# Altium PCB Pcb.PcbDoc
Units mm, origin at the board's own origin, x right, y up, seen from the top; angles counter-clockwise.
Board outline 76.52 x 28.6 mm, 2 copper layers (Top Layer, Bottom Layer), stack 1.071 mm thick; 63 components, 42 nets, 219 pads, 56 vias.
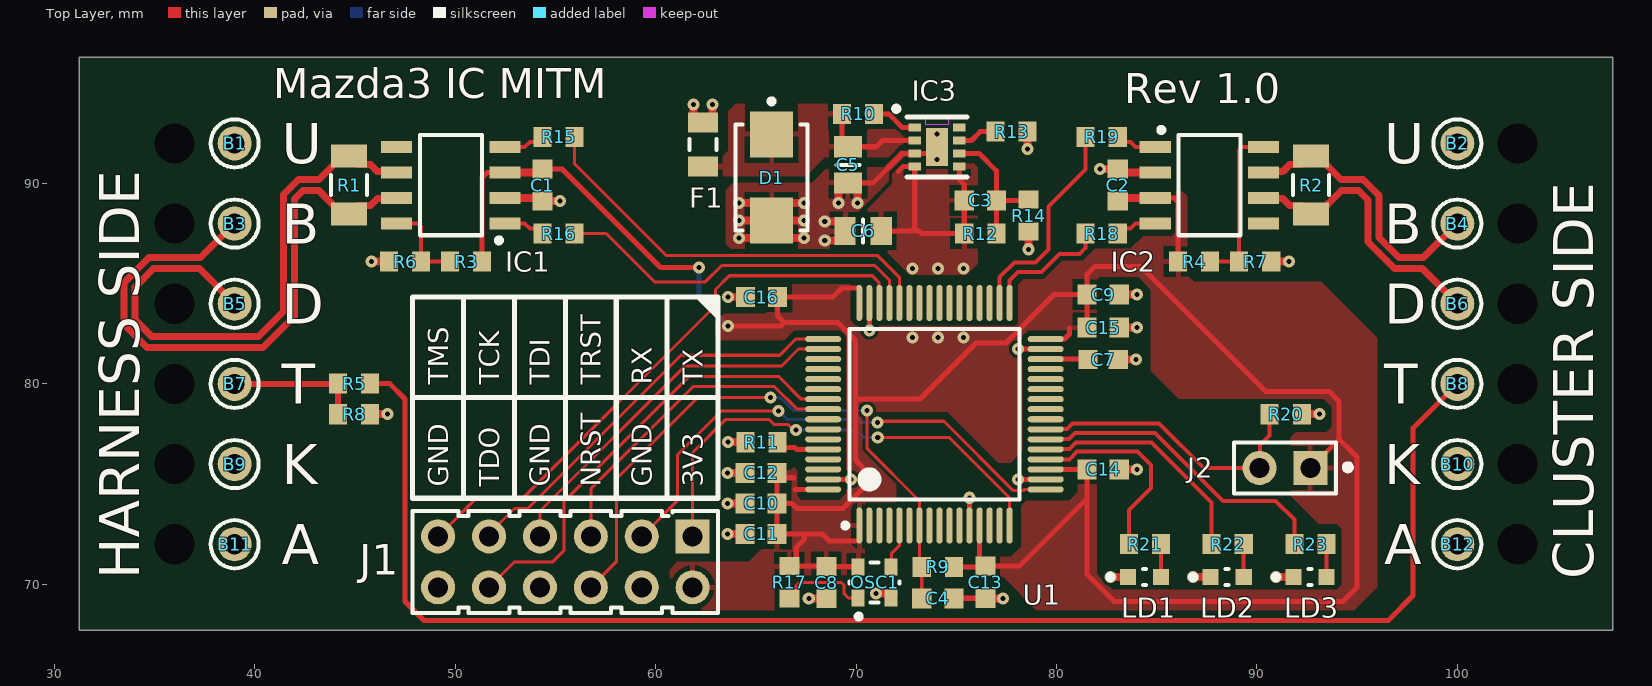
[diagram p0: Top Layer view]
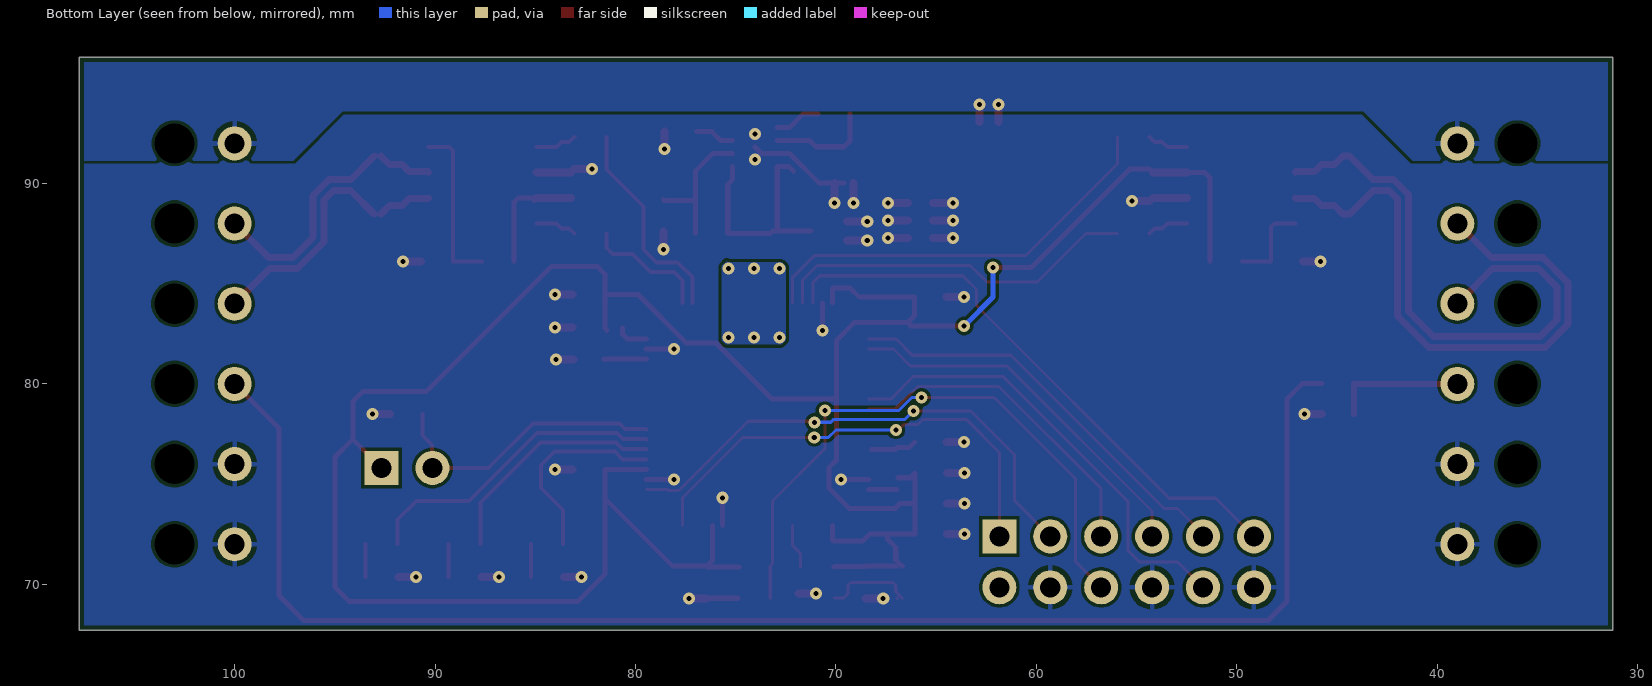
[diagram p1: Bottom Layer view, seen from below]
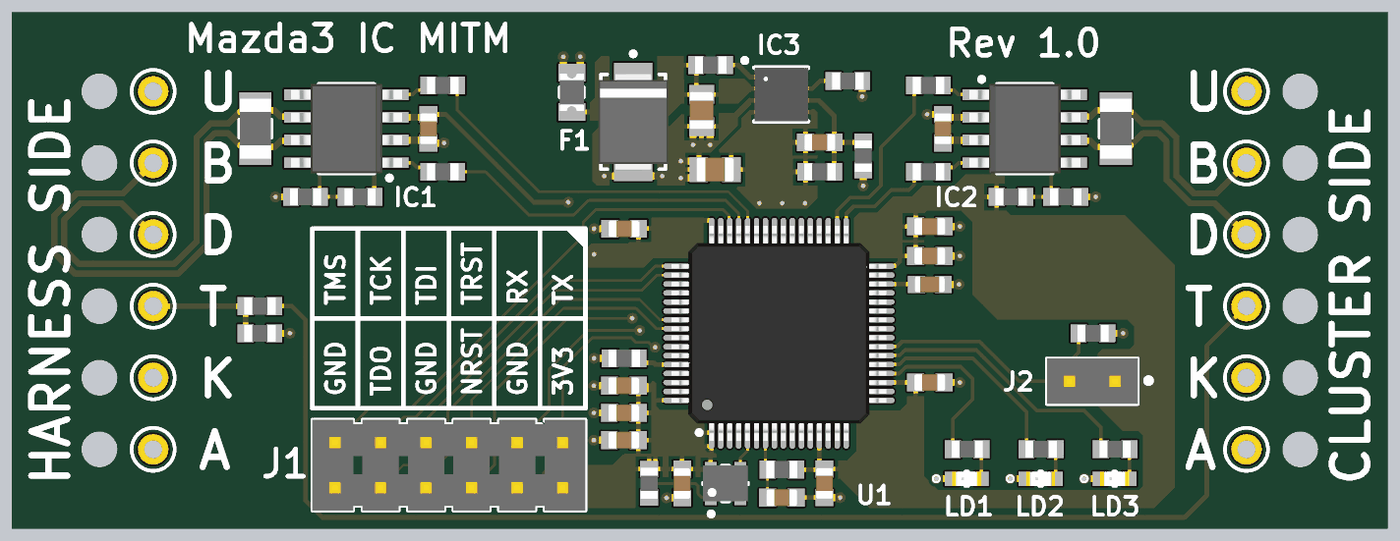
[diagram p2: 3D render of the assembled board from above, using the file's embedded part models]

## Layer stack, top to bottom
Top Solder: solder mask 0.0102, Solder Resist, Dk 3.5
Top Layer: signal copper 0.0356
Dielectric 1: dielectric 1, FR-4, Dk 4.8
Bottom Layer: signal copper 0.0356
Bottom Solder: solder mask 0.0102, Solder Resist, Dk 3.5

## Board outline
31.242,67.7 31.242,96.3 107.758,96.3 107.758,67.7

## Design rules (kind name [scope] priority, off if disabled: settings)
BoardOutlineClearance [All] p1: gap=0.254 ignorepadtopadclearanceinfootprint=FALSE except(0: Arc-SplitContinuation Track-SplitContinuation SMDPad-SplitContinuation THPad-SplitContinuation Via-SplitContinuation Fill-SplitContinuation Poly-SplitContinuation Region-SplitContinuation Text-SplitContinuation)
Clearance Clearance_CAN [InNetClass('CAN') vs InNetClass('CAN')] p1: gap=0.2 ignorepadtopadclearanceinfootprint=FALSE
Clearance [All] p2: gap=0.152 ignorepadtopadclearanceinfootprint=FALSE except(0: Arc-Hole Track-Hole SMDPad-Hole THPad-Hole Via-Hole Fill-Hole Poly-Hole Region-Hole Text-Hole)
MinimumSolderMaskSliver [All] p1: minsoldermaskwidth=0.15
PolygonConnect [All] p1: thpad.connectstyle=Relief thpad.reliefconductorwidth=0.254 thpad.reliefentries=4 thpad.polygonreliefangle="90 Angle" thpad.airgapwidth=0.254 smdpad.connectstyle=Relief smdpad.reliefconductorwidth=0.254 smdpad.reliefentries=4 smdpad.polygonreliefangle="90 Angle" smdpad.airgapwidth=0.254 via.connectstyle=Direct via.reliefconductorwidth=0.254 via.reliefentries=4 via.polygonreliefangle="90 Angle" via.airgapwidth=0.254
RoomDefinition Top [InComponentClass('Top')] p1 off: confinementstyle=ConfineIn formatcopy=TRUE lockcomponents=FALSE outline 178.943,26.924 532.892,26.924 532.892,50.292 178.943,50.292
RoutingVias [All] p1: holewidth=0.711 width=0.6 viastyle="Through Hole" minholewidth=0.2 minwidth=0.45 maxholewidth=0.25 maxwidth=1.27
SolderMaskExpansion [All] p1: expansion=0.102 istentingtop=FALSE
Width [All] p1: maxlimit=2 minlimit=0.152 preferedwidth=0.254
29 further rules are at their usual default settings.

## Classes and differential pairs
net class CAN: CAR_HS_CAN_H CAR_HS_CAN_L IC_HS_CAN_H IC_HS_CAN_L

## Components (designator, comment, footprint, x,y, rotation, side; value= is the part's Value field where it differs from the comment)
B1 "Plated Hole" c170h100 39,92 r0 top
B2 "Plated Hole" c170h100 100,92 r0 top
B3 "Plated Hole" c170h100 39,88 r0 top
B4 "Plated Hole" c170h100 100,88 r0 top
B5 "Plated Hole" c170h100 39,84 r0 top
B6 "Plated Hole" c170h100 100,84 r0 top
B7 "Plated Hole" c170h100 39,80 r0 top
B8 "Plated Hole" c170h100 100,80 r0 top
B9 "Plated Hole" c170h100 39,76 r0 top
B10 "Plated Hole" c170h100 100,76 r90 top
B11 "Plated Hole" c170h100 39,72 r90 top
B12 "Plated Hole" c170h100 100,72 r90 top
C1 "100nF" CAPC1608X87N 54.356,89.916 r90 top
C2 "100nF" CAPC1608X87N 83.058,89.916 r270 top
C3 "22pF" CAPC1608X87N 76.2,89.154 r180 top
C4 "100nF" CAPC1608X87N 74.079,69.304 r180 top
C5 "22uF" CAPC2012X135N 69.596,90.932 r90 top
C6 "22uF" CAPC2012X135N 70.358,87.63 r0 top
C7 "2.2uF" CAPC1608X90N 82.334,81.217 r180 top
C8 "100nF" CAPC1608X87N 68.517,70.091 r90 top
C9 "4.7uF" CAPC1608X87N 82.334,84.455 r180 top
C10 "1uF" CAPC1608X87N 65.261,74.037 r0 top
C11 "100nF" CAPC1608X87N 65.261,72.513 r0 top
C12 "100nF" CAPC1608X87N 65.261,75.561 r0 top
C13 "100nF" CAPC1608X87N 76.454,70.104 r90 top
C14 "100nF" CAPC1608X87N 82.334,75.736 r180 top
C15 "100nF" CAPC1608X87N 82.334,82.804 r180 top
C16 "100nF" CAPC1608X87N 65.278,84.328 r0 top
D1 "SMBJ17A" DIOM5336X265N 65.786,90.297 r270 top
F1 "200mA-24V" FUSR_LITTELFUSE_0805L010 62.357,91.948 r270 top
IC1 "SN65HVD230DR" SOIC127P600X175-8N 49.784,89.916 r180 top
IC2 "SN65HVD230DR" SOIC127P600X175-8N 87.63,89.916 r0 top
IC3 "MPM3612GLQ-P" LGA10 74.041,91.821 r0 top
J1 "Header 12" SAMTEC_TSW-106-23-L-D 55.499,71.12 r180 top
J2 "Header 2" SAMTEC_TSW-101-23-L-D 91.401,75.805 r90 top
LD1 "Green" LED_KINGBRIGHT_KPH-1608CGCK 84.392,70.358 r0 top
LD2 "Green" LED_KINGBRIGHT_KPH-1608CGCK 88.519,70.358 r0 top
LD3 "Green" LED_KINGBRIGHT_KPH-1608CGCK 92.646,70.358 r0 top
OSC1 "8MHz" OSC_MICROCHIP_CDFN2520-4LD-PL-1 70.93,70.091 r90 top
R1 "120" RESC3216X65N 44.704,89.916 r90 top
R2 "120" RESC3216X65N 92.71,89.916 r270 top
R3 "Undefined" RESC1608X55N 50.546,86.106 r0 top
R4 "Undefined" RESC1608X55N 86.868,86.106 r180 top
R5 "Undefined" RESC1608X55N 44.958,80.01 r0 top
R6 "0" RESC1608X55N 47.498,86.106 r0 top
R7 "0" RESC1608X55N 89.916,86.106 r180 top
R8 "0" RESC1608X55N 44.958,78.486 r180 top
R9 "10k" RESC1608X55N 74.079,70.866 r0 top
R10 "0" RESC1608X55N 70.104,93.472 r180 top
R11 "10k" RESC1608X55N 65.278,77.089 r180 top
R12 "1M" RESC1608X55N 76.2,87.503 r180 top
R13 "1M" RESC1608X55N 77.762,92.583 r180 top
R14 "220k" RESC1608X55N 78.613,88.392 r90 top
R15 "0" RESC1608X55N 55.156,92.329 r0 top
R16 "0" RESC1608X55N 55.156,87.503 r0 top
R17 "0" RESC1608X55N 66.675,70.104 r90 top
R18 "0" RESC1608X55N 82.258,87.503 r180 top
R19 "0" RESC1608X55N 82.258,92.329 r180 top
R20 "10k" RESC1608X55N 91.44,78.486 r180 top
R21 "10k" RESC1608X55N 84.417,72.009 r180 top
R22 "10k" RESC1608X55N 88.544,72.009 r180 top
R23 "10k" RESC1608X55N 92.671,72.009 r180 top
U1 "STM32F446RE" STM-LQFP64_N 73.914,78.486 r90 top

## Footprints (in the part's own frame and the unit in brackets; to place one, negate y for a bottom-side part, rotate by r counter-clockwise, add the part's x,y. Pads: shape width x height; smd on the part's side, far side on the other; paste and mask are expansions set on the pad)
c170h100 [mm] "Plated Through Hole: Hole Dia.=1mm Pad Dia.=1.7mm, IPC-7251 Level A"
  round 1.7 hole 1: 1(0,0)
  silkscreen extent -1.2,-1.2 1.2,1.2
CAPC1608X87N [mm] "Chip Capacitor, Body 1.6x0.8mm IPC Medium Density"
  rect 0.95x1 smd: 1(-0.8,0) 2(0.8,0)
  body extent -0.87,-0.47 0.88,0.48, height 0.87
CAPC1608X90N [mm] "Chip Capacitor, Body 1.6x0.8mm IPC Medium Density"
  rect 0.95x0.95 smd: 1(-0.75,0) 2(0.75,0)
  body extent -0.85,-0.45 0.85,0.45, height 0.9
CAPC2012X135N [mm] "Chip Capacitor, Body 2.0x1.25mm, IPC Medium Density"
  rect 1.05x1.4 smd: 1(-0.9,0) 2(0.9,0)
  silkscreen extent 0,-0.58 0,0.58, body extent -1.05,-0.67 1.05,0.68, height 1.25
DIOM5336X265N [mm] "DO-214-AA/SMB Diode, Molded Body; 5.34mm L X 3.625mm W X 2.65mm H, IPC Medium Density"
  rect 2.3x2.15 smd: 1(-2.15,0) 2(2.15,0)
  silkscreen extent -3.92,-1.8 2.65,1.8, body extent -2.7,-1.95 2.7,1.95, height 2.4
FUSR_LITTELFUSE_0805L010 [mm] "Surface Mount POLY-FUSE® Resettable PTC, 0805L Series"
  rect 1x1.5 smd: 1(-1.1,0) 2(1.1,0)
  silkscreen extent -0.28,-0.67 0.28,0.67, body extent -1.05,-0.67 1.05,0.68, height 1
LED_KINGBRIGHT_KPH-1608CGCK [mm] "SMT Green LED, Case 0603, Body L 1.6 x W 0.8mm H 0.65mm"
  rect 0.8x0.8 smd: 1(-0.825,0) 2(0.825,0)
  silkscreen extent -1.82,-0.4 0.08,0.4, body extent -0.8,-0.4 0.8,0.4, height 0.65
LGA10 [mm] "LGA (3mmx3mmx2mm)"
  rect 0.625x0.4 smd: 1(-1.112,0.975) 2(-1.112,0.325) 3(-1.112,-0.325) 4(-1.112,-0.975) 5(1.112,-0.975) 6(1.112,-0.325) 7(1.112,0.325) 8(1.112,0.975)
  rect 1.1x1.9 smd: EP(0,0)
  Top Layer keep-out region: -0.575,1.125 0.575,1.125 0.575,1.525 -0.575,1.525
  silkscreen extent -2.16,-1.5 1.5,2.03, body extent -1.5,-1.5 1.5,1.5, height 2.01
OSC_MICROCHIP_CDFN2520-4LD-PL-1 [mm] "MICROCHIP Case CDFN2520-4LD-PL-1, SMD Oscillator, QFN, 4 pins, 2.5mm x 2.0mm"
  rect 0.85x0.65 smd: 1(-0.775,0.825) 2(-0.775,-0.825) 3(0.775,-0.825) 4(0.775,0.825)
  silkscreen extent -1.82,-1.25 1,1.25, body extent -1,-1.25 1,1.25, height 0.9
RESC1608X55N [mm] "Chip Resistor, EIA 0603, Metric 1608, Body 1.6x0.8mm, IPC Medium Density"
  rect 0.9x1 smd: 1(-0.8,0) 2(0.8,0)
  body extent -0.87,-0.47 0.88,0.48, height 0.55
RESC3216X65N [mm] "Chip Resistor, EIA 1206, Metric 3216, Body 3.2x1.6mm, IPC Medium Density"
  rect 1.15x1.8 smd: 1(-1.45,0) 2(1.45,0)
  silkscreen extent -0.5,-0.9 0.5,0.9, body extent -1.67,-0.87 1.68,0.88, height 0.65
SAMTEC_TSW-101-23-L-D [mm] "2 Contacts - Pitch 2.54mm - Dual Row  Through Mount Straigh Header (Post Lead 5.84mm, Tail Lead 2.92mm, Insulator 2.54mm)"
  rect 1.7x1.7 hole 1: 1(0,-1.27)
  round 1.7 hole 1: 2(0,1.27)
  silkscreen extent -1.27,-3.28 1.27,2.54, body extent -1.27,-2.54 1.27,2.54, height 8.38
SAMTEC_TSW-106-23-L-D [mm] "12 Contacts - Pitch 2.54mm - Dual Row  Through Mount Straigh Header (Post Lead 5.84mm, Tail Lead 2.92mm, Insulator 2.54mm)"
  rect 1.7x1.7 hole 1: 1(-6.35,-1.27)
  round 1.7 hole 1: 2(-6.35,1.27) 3(-3.81,-1.27) 4(-3.81,1.27) 5(-1.27,-1.27) 6(-1.27,1.27) 7(1.27,-1.27) 8(1.27,1.27) 9(3.81,-1.27) 10(3.81,1.27) 11(6.35,-1.27) 12(6.35,1.27)
  silkscreen extent -7.62,-2.54 7.62,2.54, body extent -7.62,-2.54 7.62,2.54, height 8.38
SOIC127P600X175-8N [mm] "SOIC 8, Pitch 1.27mm - Body 4x5mm, IPC Medium Density"
  rect 1.55x0.6 smd: 1(-2.7,1.905) 2(-2.7,0.635) 3(-2.7,-0.635) 4(-2.7,-1.905) 5(2.7,-1.905) 6(2.7,-0.635) 7(2.7,0.635) 8(2.7,1.905)
  silkscreen extent -2.53,-2.5 1.55,2.88, body extent -3.1,-2.5 3.1,2.5, height 1.75
STM-LQFP64_N [mm] "Thin QFP, 64-Leads, Body 10x10mm, Pitch 0.5mm, IPC Medium Density"
  oval 1.8x0.3 smd: 1(-5.55,3.75) 2(-5.55,3.25) 3(-5.55,2.75) 4(-5.55,2.25) 5(-5.55,1.75) 6(-5.55,1.25) 7(-5.55,0.75) 8(-5.55,0.25) 9(-5.55,-0.25) 10(-5.55,-0.75) 11(-5.55,-1.25) 12(-5.55,-1.75) 13(-5.55,-2.25) 14(-5.55,-2.75) 15(-5.55,-3.25) 16(-5.55,-3.75) 33(5.55,-3.75) 34(5.55,-3.25) 35(5.55,-2.75) 36(5.55,-2.25) 37(5.55,-1.75) 38(5.55,-1.25) 39(5.55,-0.75) 40(5.55,-0.25) 41(5.55,0.25) 42(5.55,0.75) 43(5.55,1.25) 44(5.55,1.75) 45(5.55,2.25) 46(5.55,2.75) 47(5.55,3.25) 48(5.55,3.75)
  oval 0.3x1.8 smd: 17(-3.75,-5.55) 18(-3.25,-5.55) 19(-2.75,-5.55) 20(-2.25,-5.55) 21(-1.75,-5.55) 22(-1.25,-5.55) 23(-0.75,-5.55) 24(-0.25,-5.55) 25(0.25,-5.55) 26(0.75,-5.55) 27(1.25,-5.55) 28(1.75,-5.55) 29(2.25,-5.55) 30(2.75,-5.55) 31(3.25,-5.55) 32(3.75,-5.55) 49(3.75,5.55) 50(3.25,5.55) 51(2.75,5.55) 52(2.25,5.55) 53(1.75,5.55) 54(1.25,5.55) 55(0.75,5.55) 56(0.25,5.55) 57(-0.25,5.55) 58(-0.75,5.55) 59(-1.25,5.55) 60(-1.75,5.55) 61(-2.25,5.55) 62(-2.75,5.55) 63(-3.25,5.55) 64(-3.75,5.55)
  silkscreen extent -5.67,-4.25 4.25,4.57, body extent -6,-6 6,6, height 1.5

## Part data
B1 B2 B3 B4 B5 B6 B7 B8 B9 B10 B11 B12: library part PLATED_HOLE1.0_PAD1.7, "Single Terminal Socket", Author="CERN DEM JLC", Component Type="Standard (No BOM)", ComponentHeight=0mm, CreateDate=11/05/2017, Family="Plated Hole", HelpURL=Undefined, LatestRevisionDate=11/05/2017, Mounted=No, PackageDescription="Plated Through Hole: Hole Dia.=1.0mm Pad Dia.=1.7mm,  IPC-7251 Level A", Part Description="Plated Through Hole: Hole Dia.=1.0mm Pad Dia.=1.7mm,  IPC-7251 Level A", Part Number=PLATED_HOLE1.0_PAD1.7, Pin Count=1, Sense=No, SMD=No, Socket=No, Status=None
C1 C2 C4 C8 C11 C12 C13 C14 C15 C16: library part CC0603_100NF_50V_10%_X5R, "Non-polarised capacitor", Case=0603, Manufacturer=GENERIC, Manufacturer1=TDK, Manufacturer1 ComponentHeight=0.9mm, Manufacturer1 Part Number=C1608X5R1H104K080AA, Tolerance=±10%, Voltage=50V, Author="CERN DEM MR", Component Type=Standard, CreateDate=08/01/2016, HelpURL=\\cern.ch\dfs\Applications\Altium\Datasheets\CC0603_X5R_TDK_C.pdf, LatestRevisionDate=08/01/2016, Manufacturer Part Number=CC0603_100NF_50V_10%_X5R, Mounted=Yes, Part Description="SMD Multilayer Chip Ceramic Capacitor", Part Number=CC0603_100NF_50V_10%_X5R, Pin Count=2, Sense=No, SMD=Yes, Socket=No, Status=None, TC=X5R
C3: library part CC0603_22PF_50V_5%_NP0, "Non-polarised capacitor", Case=0603, Manufacturer=GENERIC, Manufacturer1=PHYCOMP, Manufacturer1 ComponentHeight=0.87mm, Manufacturer1 Part Number=223886715229, Tolerance=±5%, Voltage=50V, Author="CERN DEM JLC", Component Type=Standard, CreateDate=03/12/2007, HelpURL=\\cern.ch\dfs\Applications\Altium\Datasheets\CC0603_NP0_PHYCOMP.pdf, LatestRevisionDate=03/12/2007, Manufacturer Part Number=CC0603_22PF_50V_5%_NP0, Mounted=Yes, Part Description="SMD Multilayer Chip Ceramic Capacitor", Part Number=CC0603_22PF_50V_5%_NP0, Pin Count=2, Sense=No, SMD=Yes, Socket=No, Status=Preferred, TC=C0G/NP0
C5 C6: library part CC0805_22UF_16V_10%_X5R, "Non-polarised capacitor", Case=0805, Manufacturer=GENERIC, Manufacturer1=Samsung, Manufacturer1 ComponentHeight=1.35mm, Manufacturer1 Part Number=CL21X226MAYNNWE, Manufacturer Part Number=CC0805_22UF_25V_20%_X6S, Tolerance=±20%, Voltage=25V, Author="CERN DEM JLC", Component Type=Standard, CreateDate=25/10/2012, HelpURL=\\cern.ch\dfs\Applications\Altium\Datasheets\CC0805_X5R_TDK_C.pdf, LatestRevisionDate=25/10/2012, Mounted=Yes, Part Description="SMD Multilayer Chip Ceramic Capacitor", Part Number=CC0805_22UF_25V_20%_X6S, Pin Count=2, Sense=No, SMD=Yes, Socket=No, Status=Preferred, TC=X6S
C7: library part CC0603_2.2UF_10V_20%_X7R, "Non-polarised capacitor", Case=0603, Manufacturer=GENERIC, Manufacturer1="TAIYO YUDEN", Manufacturer1 ComponentHeight=0.9mm, Manufacturer1 Part Number=LMK107B7225MA-T, Tolerance=±20%, Voltage=10V, Author="CERN DEM JLC", Component Type=Standard, CreateDate=22/06/2011, HelpURL=\\cern.ch\dfs\Applications\Altium\Datasheets\CC0603_X7R_TAIYO-YUDEN_HIGH-VALUE.pdf, LatestRevisionDate=27/06/2011, Manufacturer Part Number=CC0603_2.2UF_10V_20%_X7R, Mounted=Yes, Part Description="SMD Multilayer Chip Ceramic Capacitor", Part Number=CC0603_2.2UF_10V_20%_X7R, Pin Count=2, Sense=No, SMD=Yes, Socket=No, Status="Not Recommended", TC=X7R
C9: library part CC0603_4.7UF_6.3V_10%_X5R, "Non-polarised capacitor", Case=0603, Manufacturer=GENERIC, Manufacturer1=PHYCOMP, Manufacturer1 ComponentHeight=0.87mm, Manufacturer1 Part Number=225520613672, Manufacturer Part Number=CC0603_4.7uF_6.3V_10%_X5R, Tolerance=±10%, Voltage=6.3V, Author="CERN DEM JLC", Component Type=Standard, CreateDate=03/12/2007, HelpURL=\\cern.ch\dfs\Applications\Altium\Datasheets\CC0805_X5R_PHYCOMP_HC.pdf, LatestRevisionDate=03/12/2007, Mounted=Yes, Part Description="SMD Multilayer Chip Ceramic Capacitor", Part Number=CC0603_4.7UF_6.3V_10%_X5R, Pin Count=2, Sense=No, SMD=Yes, Socket=No, Status=Preferred, TC=X5R
C10: library part CC0603_1UF_16V_10%_X7R, "Non-polarised capacitor", Case=0603, Manufacturer=GENERIC, Manufacturer1="YAGEO PHYCOMP", Manufacturer1 ComponentHeight=0.9mm, Manufacturer1 Part Number=223878615663, Manufacturer Part Number=CC0603_1uF_16V_10%_X7R, Tolerance=±10%, Voltage=16V, Author="CERN DEM JLC", Component Type=Standard, CreateDate=03/12/2007, HelpURL=\\cern.ch\dfs\Applications\Altium\Datasheets\CC0603_X7R_PHYCOMP.pdf, LatestRevisionDate=17/04/2015, Mounted=Yes, Part Description="SMD Multilayer Chip Ceramic Capacitor", Part Number=CC0603_1UF_16V_10%_X7R, Pin Count=2, Sense=No, SMD=Yes, Socket=No, Status=None, TC=X7R
D1: library part SMBJ15A, "Zener Diode", Case=DO-214AA, Manufacturer1="FAIRCHILD SEMICONDUCTOR", Power=600W, Voltage=17V, Author="CERN DEM JLC", Bonding=No, Component Type=Standard, ComponentHeight=2.65mm, CreateDate=08.12.2008, Device=SMBJ17A, HelpURL=\\cern.ch\dfs\Applications\Altium\Datasheets\SMBJ.pdf, LatestRevisionDate=19.12.2011, Manufacturer1 Part Number=SMBJ17A, Mounted=Yes, PackageDescription="DO-214-AA/SMB Diode, Molded Body; 5.34mm L X 3.625mm W X 2.65mm H, IPC Medium Density", Part Description="Uni-Directional Transient Voltage Suppressor Diode", Part Number=SMBJ17A, Pin Count=2, PressFit=No, Sense=No, SMD=Yes, Socket=No
F1: library part FUSR_LITTELFUSE_0805L010YR, "Fuse", Manufacturer1=LITTELFUSE, Manufacturer1 Part Number=0805L020/24YR, Author="CERN DEM JLC", Component Type=Standard, ComponentHeight=1mm, CreateDate=11/09/2012, Family="Fuses Resettable", HelpURL=\\cern.ch\dfs\Applications\Altium\Datasheets\FUSR_LITTELFUSE_0805L010YR.pdf, LatestRevisionDate=11/09/2012, Mounted=Yes, PackageDescription="Surface Mount POLY-FUSE® Resettable PTC, 0805L Series", Part Description="POLYFUSE® Surface Mount Resettable PTC", Part Number=0805L020/24YR, Pin Count=2, PressFit=No, Sense=No, SMD=Yes, Socket=No
IC1 IC2: "3.3V CAN Bus Transceiver", Case=SOIC8, Manufacturer1="TEXAS INSTRUMENTS", Author="CERN DEM JMW", Bonding=No, Component Type=Standard, ComponentHeight=1.75mm, CreateDate=22/10/2015, Device=SN65HVD230DR, HelpURL=\\cern.ch\dfs\Applications\Altium\Datasheets\SN65HVD233DG4.pdf, LatestRevisionDate=22/10/2015, Manufacturer1 Part Number=SN65HVD230DR, Mounted=Yes, PackageDescription="SOIC 8, Pitch 1.27mm, Body 4x5mm, IPC Medium Density", Part Description="3.3V CAN Bus Transceiver", Part Number=SN65HVD230DR, Pin Count=8, PressFit=No, Sense=No, SMD=Yes, Socket=No
IC3: Manufacturer1=MPS, Manufacturer1 Part Number=MPM3612GLQ-P, Part Number=MPM3612GLQ-P
J1: library part SAMTEC_TSW-106-23-L-D, "Connector 12 Male", Manufacturer1=SAMTEC, Manufacturer1 Part Number=TSW-106-23-L-D, Author="CERN DEM MR", Component Type=Standard, ComponentHeight=8.38mm, CreateDate=08/03/2017, Family="Header 12", HelpURL=\\cern.ch\dfs\Applications\Altium\Datasheets\SAMTEC_TSW-106-23-L-D.pdf, LatestRevisionDate=08/03/2017, Mounted=Yes, Part Description="12 Contacts, Pitch 2.54mm, Dual Row Through Mount Straight Header (Post Lead 5.84mm, Tail Lead 2.92mm, Insulator 2.54mm)", Part Number=SAMTEC_TSW-106-23-L-D, Pin Count=12, PressFit=No, Sense=No, SMD=No, Socket=No, Status=None
J2: library part SAMTEC_TSW-101-23-L-D, "Connector 2 Male", Manufacturer1=SAMTEC, Manufacturer1 Part Number=TSW-101-23-L-D, Author="CERN DEM MR", Component Type=Standard, ComponentHeight=8.38mm, CreateDate=08/03/2017, Family="Header 2", HelpURL=\\cern.ch\dfs\Applications\Altium\Datasheets\SAMTEC_TSW-101-23-L-D.pdf, LatestRevisionDate=08/03/2017, Mounted=Yes, Part Description="2 Contacts, Pitch 2.54mm, Dual Row Through Mount Straight Header (Post Lead 5.84mm, Tail Lead 2.92mm, Insulator 2.54mm)", Part Number=SAMTEC_TSW-101-23-L-D, Pin Count=2, PressFit=No, Sense=No, SMD=No, Socket=No, Status=None
LD1 LD2 LD3: library part LED_KINGBRIGHT_KPH-1608CGCK, "LED Green 1C 2A", Manufacturer1=KINGBRIGHT, Manufacturer1 Part Number=KPH-1608CGCK, Author="CERN DEM JLC", Bonding=No, Color=Green, Component Type=Standard, ComponentHeight=0.65mm, CreateDate=03/07/2017, HelpURL=\\cern.ch\dfs\Applications\Altium\Datasheets\LED_KINGBRIGHT_KPH-1608CGCK.pdf, LatestRevisionDate=03/07/2017, Mounted=Yes, PackageDescription="SMT Green LED, Case 0603, Body L 1.6 x W 0.8mm H 0.65mm", Part Description="SMD Green LED, Case 1.6mmX0.8mm(0603), 0.65mm Thickness", Part Number=LED_KINGBRIGHT_KPH-1608CGCK, Pin Count=2, PressFit=No, Sense=No, SMD=Yes, Socket=No
OSC1: library part OSC_25MHZ_MICROCHIP_DSC1003DL5-025.0000, "Oscillator 4 pins 1=S\T\ 2=GND 3=OUT 4=VDD", Manufacturer1="MICROCHIP TECHNOLOGY", Manufacturer1 Part Number=DSC1003DL2-008.0000, Part Number=OSC_8MHZ_MICROCHIP_DSC1003DL2-008.0000, Author="CERN DEM JLC", Bonding=No, Component Type=Standard, ComponentHeight=0.9mm, CreateDate=16/08/2018, HelpURL=\\cern.ch\dfs\Applications\Altium\Datasheets\OSC_MICROCHIP_DSC1003.pdf, LatestRevisionDate=16/08/2018, Mounted=Yes, PackageDescription="MICROCHIP Case CDFN2520-4LD-PL-1, SMD Oscillator, DFN, 4 pins, 2.5mm x 2.0mm", Part Description="1.8V-3.3V, ±10ppm, 25pF, -40..105°C, Surface Mount Low-Power Precision CMOS Oscillator (DSC1001 Series)", Pin Count=4, PressFit=No, Sense=No, SMD=Yes, Socket=No
R1 R2: library part R1206_120R_1%_0.25W_100PPM, "Resistor - 1%", Case=1206, Manufacturer=GENERIC, Manufacturer1="NIC COMPONENT", Manufacturer1 ComponentHeight=0.65mm, Manufacturer1 Part Number=NRC12F1200TRF, Power=0.25W, Tolerance=±1%, Author="CERN DEM JLC", Component Type=Standard, CreateDate=03/12/2007, HelpURL=\\cern.ch\dfs\Applications\Altium\Datasheets\R1206_NIC_NRC.pdf, LatestRevisionDate=13/03/2008, Manufacturer Part Number=R1206_120R_1%_0.25W_100PPM, Mounted=Yes, Part Description="General Purpose Thick Film Chip Resistor", Part Number=R1206_120R_1%_0.25W_100PPM, Pin Count=2, PressFit=No, Sense=No, SMD=Yes, Socket=No, Status=Preferred, TC=±100ppm/°C
R3 R4 R5: library part R0603_NO-VALUE, "Resistor", Case=0603, Author="CERN DEM JLC", Component Type=Standard, CreateDate=03.12.2007, HelpURL=Undefined, LatestRevisionDate=13.03.2008, Manufacturer=Undefined, Manufacturer1 ComponentHeight=Undefined, Manufacturer1 Example=Undefined, Manufacturer1 Part Number=Undefined, Manufacturer Part Number=R0603_NO-VALUE, Mounted=No, Part Description="Reserved Footprint For a 0603 (1608) Chip Resistor", Part Number=R0603_NO-VALUE, Pin Count=2, PressFit=No, Sense=No, SMD=Yes, Socket=No, Status=None
R6 R7 R8 R10 R15 R16 R17 R18 R19: library part R0603_0R_JUMPER, "Resistor", Case=0603, Manufacturer=GENERIC, Manufacturer1="NIC COMPONENT", Manufacturer1 ComponentHeight=0.55mm, Manufacturer1 Part Number=NRC06Z0, Author="CERN DEM JLC", Component Type=Standard, CreateDate=03.12.2007, HelpURL=\\cern.ch\dfs\Applications\Altium\Datasheets\R0603_NIC_NRC.pdf, LatestRevisionDate=13.03.2008, Manufacturer Part Number=R0603_0R_JUMPER, Mounted=Yes, Part Description="1A (0.05R Max DC Resistance) Zero Ohm Jumper", Part Number=R0603_0R_JUMPER, Pin Count=2, PressFit=No, Sense=No, SMD=Yes, Socket=No, Status=Preferred
R9 R11 R20 R21 R22 R23: library part R0603_10K_1%_0.1W_100PPM, "Resistor - 1%", Case=0603, Manufacturer=GENERIC, Manufacturer1="NIC COMPONENT", Manufacturer1 ComponentHeight=0.55mm, Manufacturer1 Part Number=NRC06F1002TRF, Power=0.1W, Tolerance=±1%, Author="CERN DEM JLC", Component Type=Standard, CreateDate=03/12/2007, HelpURL=\\cern.ch\dfs\Applications\Altium\Datasheets\R0603_NIC_NRC.pdf, LatestRevisionDate=13/03/2008, Manufacturer Part Number=R0603_10K_1%_0.1W_100PPM, Mounted=Yes, Part Description="General Purpose Thick Film Chip Resistor", Part Number=R0603_10K_1%_0.1W_100PPM, Pin Count=2, PressFit=No, Sense=No, SMD=Yes, Socket=No, Status=Preferred, TC=±100ppm/°C
R12 R13: library part R0603_1M_1%_0.1W_100PPM, "Resistor - 1%", Case=0603, Manufacturer=GENERIC, Manufacturer1="NIC COMPONENT", Manufacturer1 ComponentHeight=0.55mm, Manufacturer1 Part Number=NRC06F1004TRF, Power=0.1W, Tolerance=±1%, Author="CERN DEM JLC", Component Type=Standard, CreateDate=03/12/2007, HelpURL=\\cern.ch\dfs\Applications\Altium\Datasheets\R0603_NIC_NRC.pdf, LatestRevisionDate=13/03/2008, Manufacturer Part Number=R0603_1M_1%_0.1W_100PPM, Mounted=Yes, Part Description="General Purpose Thick Film Chip Resistor", Part Number=R0603_1M_1%_0.1W_100PPM, Pin Count=2, PressFit=No, Sense=No, SMD=Yes, Socket=No, Status=Preferred, TC=±100ppm/°C
R14: library part R0603_220K_1%_0.1W_100PPM, "Resistor - 1%", Case=0603, Manufacturer=GENERIC, Manufacturer1="NIC COMPONENT", Manufacturer1 ComponentHeight=0.55mm, Manufacturer1 Part Number=NRC06F2203TRF, Power=0.1W, Tolerance=±1%, Author="CERN DEM JLC", Component Type=Standard, CreateDate=03/12/2007, HelpURL=\\cern.ch\dfs\Applications\Altium\Datasheets\R0603_NIC_NRC.pdf, LatestRevisionDate=13/03/2008, Manufacturer Part Number=R0603_220K_1%_0.1W_100PPM, Mounted=Yes, Part Description="General Purpose Thick Film Chip Resistor", Part Number=R0603_220K_1%_0.1W_100PPM, Pin Count=2, PressFit=No, Sense=No, SMD=Yes, Socket=No, Status=Preferred, TC=±100ppm/°C
U1: "Arm® Cortex®-M4 core with DSP and FPU, 512 Kbytes Flash, 180 MHz CPU, ART Accelerator, Dual QSPI", Manufacturer1=STMicroelectronics, Manufacturer1 Part Number=STM32F446RET7, Manufacturer 1 Component Height=1.6mm, Supplier Part Number 1=511-STM32F446RET6, Author=PC, Create Date=29/03/2020, DesignItemId=STM32F446RE, HelpURL=https://www.st.com/resource/en/datasheet/stm32f446re.pdf, LatestRevisionDate=29/03/2020, Mounted=Yes, Part Description="Arm® Cortex®-M4 core with DSP and FPU, 512 Kbytes Flash, 180 MHz CPU, ART Accelerator, Dual QSPI", Part Number=STM32F446RE, Pin Count=64, PressFit=No, Sense=No, SMD=Yes, Socket=No, Supplier 1=Mouser, Supplier 2=Digi-Key

## Free pads (board coordinates)
  round 0 hole 2 unplated: 2(36,72) 2(36,76) 2(36,80) 2(36,84) 2(36,88) 2(36,92) 2(103,72) 2(103,76) 2(103,80) 2(103,84) 2(103,88) 2(103,92)

## Via types
v1: diameter 0.6, hole 0.25, Top Layer to Bottom Layer, tented both sides, 54 vias
v2: diameter 0.6, hole 0.25, Top Layer to Bottom Layer, 2 vias

## Nets (pads, with @x,y where several pads share a name; then routed paths per layer and width w, separated by ;. In a path a pad name is that pad's centre, name@x,y a point inside that pad or via, vN(x,y) a via of type N, cw(c..) or ccw(c..) an arc to the next point about the centre after c; other vN are vias at no path point)
CAN1_RX: R15.2 U1.44 | length 21.2
  Top Layer w0.152: R15.2 55.956,90.983 60.542,86.397 71.083,86.397 72.164,85.316 U1.44
CAN1_TX: R16.2 U1.45 | length 18.5
  Top Layer w0.152: R16.2 57.531,87.503 59.944,85.09 62.484,85.09 63.304,85.91 70.935,85.91 71.664,85.181 U1.45
CAN2_RX: R18.2 U1.33 | length 6.3
  Top Layer w0.2: U1.33 77.664,85.157 78.087,85.58 79.253,85.58 80.16,86.487 81.153,86.487 81.458,86.792 R18.2
CAN2_TX: R19.2 U1.34 | length 10.7
  Top Layer w0.2: U1.34 77.164,85.333 77.898,86.067 78.955,86.067 79.603,86.715 79.603,88.853 81.458,90.708 R19.2
CAR_HS_CAN_D: IC1.1 R16.1 | length 2.1
  Top Layer w0.2: IC1.1 53.467,88.011 53.723,87.755 54.104,87.755 R16.1
CAR_HS_CAN_H: B3.1 IC1.7 R1.1 | length 30.4
  Top Layer w0.35: B3.1 37.301,86.301 34.723,86.301 33.488,85.066 33.488,82.967 34.632,81.823 40.415,81.823 41.976,83.383 41.976,89.22 42.407,89.651 43.194,89.651 44.379,88.466 R1.1 45.133,88.895 45.775,88.895 46.126,89.246 47.049,89.246 IC1.7
CAR_HS_CAN_L: B5.1 IC1.6 R1.2 | length 28.6
  Top Layer w0.35: B5.1 37.249,85.751 34.951,85.751 34.038,84.838 34.038,83.194 34.86,82.372 40.187,82.372 41.426,83.611 41.426,89.448 42.179,90.201 43.214,90.201 44.379,91.366 R1.2 45.133,90.937 45.775,90.937 46.126,90.586 47.049,90.586 IC1.6
CAR_HS_CAN_R: IC1.4 R15.1 | length 2.1
  Top Layer w0.2: IC1.4 53.467,91.821 53.723,92.077 54.104,92.077 R15.1
CAR_PIN_T: B7.1 R5.1 R8.2 | length 6.7
  Top Layer w0.3: B7.1 44.148,80 R5.1 R8.2
GND: B9.1 B10.1 B11.1 B12.1 C1.1 C2.1 C4.1 C5.1 C6.1 C7.1 C8.1 C9.1 C10.1 C11.1 C12.1 C13.1 C14.1 C15.1 C16.1 D1.2 IC1.2 IC2.2 IC3.3 IC3.EP J1.4 J1.8 J1.12 LD1.1 LD2.1 LD3.1 OSC1.2 R6.1 R7.1 R8.1 R11.2 R13.1 R14.1 R20.1 U1.12 U1.18 U1.31 U1.47 U1.63 | length 46.2
  Top Layer w0.254: C1.1@54.191,89.281 C1.1 ; U1.63 v1(69.747,75.236) ; C5.1 70.855,90.032 72.319,91.496 IC3.3 73.716,91.496 IC3.EP ; v1(70.664,82.653) U1.47 ; C4.1 C13.1 ; U1.12 v1(75.664,74.319) ; v1(78.081,75.236) U1.18 ; v1(78.081,81.736) U1.31
  Top Layer w0.4: R8.1 v1(46.633,78.486) ; v1(45.823,86.106) R6.1 ; IC1.2 C1.1@54.191,89.281 ; C1.1 v1(55.231,89.116) ; v1(63.586,72.513) C11.1 ; v1(63.586,74.037) C10.1 ; v1(63.586,75.561) C12.1 ; v1(63.603,77.089) R11.2 ; v1(63.603,84.328) C16.1 ; v1@64.292,87.268 D1.2@65.167,87.268 ; v1@64.292,88.147 D1.2@65.167,88.147 ; v1@64.292,89.026 D1.2@65.167,89.026 ; D1.2@66.405,87.268 v1@67.28,87.268 ; D1.2@66.405,88.147 v1@67.28,88.147 ; D1.2@66.405,89.026 v1@67.28,89.026 ; v1(67.642,69.291) C8.1 ; v1@68.567,87.157 C6.1@69.442,87.157 ; v1@68.567,88.103 C6.1@69.442,88.103 ; v1@69.123,89.141 C5.1@69.123,90.016 ; v1@70.069,89.141 C5.1@70.069,90.016 ; v1(71.004,69.54) OSC1.2@71.879,69.54 ; C13.1 v1(77.329,69.304) ; v1(78.562,91.708) R13.1 ; v1(78.613,86.717) R14.1 ; v1(82.183,90.716) C2.1 ; v1(82.692,70.358) LD1.1 ; C7.1 v1(83.959,81.217) ; C14.1 v1(84.009,75.736) ; C15.1 v1(84.009,82.804) ; C9.1 v1(84.009,84.455) ; C2.1@83.223,90.551 IC2.2 ; v1(86.819,70.358) LD2.1 ; R7.1 v1(91.591,86.106) ; v1(90.946,70.358) LD3.1 ; R20.1 v1(93.115,78.486)
  other v1: 68.44,87.157 64.165,87.268 67.407,87.268 68.44,88.103 64.165,88.147 67.407,88.147 69.123,89.014 70.069,89.014 64.165,89.026 67.407,89.026
  other v2: 74.041,91.186 74.041,92.456
IC_HS_CAN_D: IC2.1 R19.1 | length 2.1
  Top Layer w0.2: R19.1 83.31,92.077 83.691,92.077 83.947,91.821 IC2.1
IC_HS_CAN_H: B4.1 IC2.7 R2.1 | length 13.7
  Top Layer w0.35: IC2.7 90.365,90.586 91.288,90.586 91.639,90.937 92.281,90.937 R2.1 ; R2.1@93.035,91.366 94.2,90.201 95.296,90.201 96.089,89.408 96.089,87.299 97.087,86.301 98.301,86.301 B4.1
IC_HS_CAN_L: B6.1 IC2.6 R2.2 | length 13.7
  Top Layer w0.35: IC2.6 90.365,89.246 91.288,89.246 91.639,88.895 92.281,88.895 R2.2 ; R2.2@93.035,88.466 94.22,89.651 95.069,89.651 95.539,89.18 95.539,87.071 96.859,85.751 98.249,85.751 B6.1
IC_HS_CAN_R: IC2.4 R18.1 | length 2.1
  Top Layer w0.2: R18.1 83.31,87.755 83.691,87.755 83.947,88.011 IC2.4
IC_PIN_T: B8.1 R5.2 | length 74.8
  Top Layer w0.254: R5.2 46.736,80.01 47.497,79.249 47.497,69.143 48.442,68.199 96.552,68.199 97.79,69.437 97.79,77.79 B8.1
LED1: R21.2 U1.20 | length 10.1
  Top Layer w0.2: U1.20 80.643,76.236 81.027,76.62 84.035,76.62 84.709,75.946 84.709,74.803 83.617,73.711 R21.2
LED2: R22.2 U1.21 | length 11.7
  Top Layer w0.2: U1.21 79.483,76.755 80.651,76.755 80.977,77.081 84.734,77.081 87.744,74.072 R22.2
LED3: R23.2 U1.22 | length 15.5
  Top Layer w0.2: U1.22 79.483,77.255 80.636,77.255 80.929,77.548 84.928,77.548 88.308,74.168 90.932,74.168 91.871,73.229 R23.2
LED_EN: J2.2 R20.2 U1.23 | length 14.6
  Top Layer w0.2: U1.23 79.483,77.755 80.523,77.755 80.796,78.028 85.126,78.028 87.349,75.805 J2.2 90.163,75.837 90.163,76.955 90.64,77.432 R20.2
MCU_CLK: OSC1.3 U1.5 | length 2.2
  Top Layer w0.152: OSC1.3 71.763,70.874 71.763,71.523 72.164,71.925 U1.5
NetC3_1: C3.1 IC3.6 R12.1 R14.2 | length 7
  Top Layer w0.254: IC3.6 76.144,91.496 77,90.64 C3.1 ; R12.1 C3.1 ; R14.2 78.575,89.154 C3.1
NetC5_2: C5.2 D1.1 F1.2 IC3.2 R10.2 | length 5.2
  Top Layer w0.254: R10.2 69.304,92.124 C5.2 71.004,91.832 71.318,92.146 IC3.2
NetC7_2: C7.2 U1.30 | length 2.1
  Top Layer w0.254: U1.30 81.565,81.236 C7.2
NetIC1_8: IC1.8 R3.1 R6.2 | length 4.5
  Top Layer w0.2: IC1.8 48.133,88.011 48.298,87.846 R6.2 R3.1
NetIC2_8: IC2.8 R4.1 R7.2 | length 8.3
  Top Layer w0.2: R4.1 R7.2 89.116,91.656 89.281,91.821 IC2.8
NetIC3_1: IC3.1 R10.1 | length 2.3
  Top Layer w0.254: R10.1 71.628,93.472 72.304,92.796 IC3.1
NetIC3_7: IC3.7 R13.2 | length 2
  Top Layer w0.254: IC3.7 75.763,92.146 76.2,92.583 R13.2
NetLD1_2: LD1.2 R21.1 | length 1.7
  Top Layer w0.2: LD1.2 R21.1
NetLD2_2: LD2.2 R22.1 | length 1.7
  Top Layer w0.2: LD2.2 R22.1
NetLD3_2: LD3.2 R23.1 | length 1.7
  Top Layer w0.2: LD3.2 R23.1
NetOSC1_1: OSC1.1 R17.1 | length 4.5
  Top Layer w0.152: R17.1@66.696,69.304 67.019,69.627 67.019,69.941 67.167,70.09 69.258,70.09 69.407,69.941 69.407,69.527 69.618,69.316 OSC1.1 ; R17.1@66.929,69.304 R17.1@66.95,69.304
NetR11_1: R11.1 U1.60 | length 2.3
  Top Layer w0.254: R11.1 66.332,76.835 66.929,76.835 67.028,76.736 U1.60@68.237,76.736
NRST: C4.2 J1.6 R9.1 U1.7 | length 30.9
  Top Layer w0.152: J1.6 58.039,71.12 58.039,75.253 62.108,79.322 v1(65.733,79.322) ; v1(70.556,78.669) 70.555,78.668 70.555,77.918 70.556,77.917 70.556,76.77 73.164,74.161 U1.7 73.164,71.019 R9.1@73.279,70.904 ; C4.2 R9.1
  Bottom Layer w0.152: v1(65.733,79.322) 66.212,79.322 66.865,78.669 v1(70.556,78.669)
P3V3: C1.2 C2.2 C3.2 C6.2 C8.2 C9.2 C10.2 C11.2 C12.2 C13.2 C14.2 C15.2 C16.2 IC1.3 IC2.3 IC3.4 IC3.5 J1.2 J2.1 OSC1.4 R3.2 R4.2 R9.2 R12.2 R17.2 U1.1 U1.13 U1.19 U1.32 U1.48 U1.64 | length 157
  Top Layer w0.254: R3.2@51.342,86.11 51.342,90.29 51.603,90.551 IC1.3 ; C1.2@54.191,90.551 C1.2 55.334,90.716 60.248,85.802 v1(62.162,85.802) ; v1(63.603,82.889) 66.252,82.889 66.421,83.058 ; R17.2 66.695,70.904 67.018,71.227 67.018,71.844 67.437,72.263 67.437,72.513 ; 66.901,75.318 66.304,75.318 C12.2 C10.2 ; R17.2@66.929,70.904 68.504,70.904 C8.2 70.08,70.891 OSC1.4 ; 66.95,74.736 U1.64 ; U1.1 70.164,72.198 70.132,72.167 68.663,72.167 68.316,72.513 67.437,72.513 ; U1.48 70.164,84.769 70.143,84.79 69.296,84.79 68.834,84.328 C16.2 66.078,83.401 66.421,83.058 ; C6.2 72.771,87.63 ; 72.112,90.603 72.355,90.846 IC3.4 72.929,87.788 72.771,87.63 ; R9.2@74.822,70.866 R9.2 76.416,70.866 C13.2 ; IC3.5 75.153,90.201 75.4,89.954 C3.2 R12.2 73.279,87.503 73.152,87.63 72.771,87.63 ; U1.13 76.164,71.194 C13.2 ; U1.19@79.455,75.745 U1.19 C14.2 81.534,74.295 ; U1.32 79.473,82.245 80.405,82.245 80.655,82.494 80.655,82.795 ; C15.2@81.421,82.666 81.534,82.779 C15.2 C9.2 ; IC2.3@85.057,89.154 IC2.3 85.852,89.281 86.068,89.065 R4.2 ; J2.1 94.107,77.241 ; C10.2 C11.2 67.437,72.513 ; C10.2 66.806,74.037 67.056,73.787 69.342,73.787 70.357,74.802 70.357,75.82 69.976,76.201 69.976,79.248 ; 66.421,83.058 69.088,83.058 69.976,82.17 69.976,79.248 ; 69.976,79.248 73.19,79.248 75.984,82.042 77.47,82.042 79.883,84.455 C9.2 ; C13.2 78.143,70.904 81.534,74.295 ; 81.534,74.295 81.534,70.485 82.878,69.141 94.287,69.141 94.996,69.85 94.996,76.352 94.107,77.241 ; C9.2 81.534,85.471 81.915,85.852 84.201,85.852 90.424,79.629 93.599,79.629 94.107,79.121 94.107,77.241
  Top Layer w0.4: IC1.3 C1.2@54.191,90.551 ; C2.2@83.223,89.281 IC2.3
  Bottom Layer w0.254: v1(62.162,85.802) 62.162,84.33 v1(63.603,82.889)
  other v1: 72.825,82.318 74.095,82.318 75.365,82.318 72.825,85.754 74.095,85.754 75.365,85.754
P12V0: B1.1 B2.1 F1.1 | length 1.7
  Top Layer w0.4: F1.1@61.884,93.064 v1(61.884,93.939) ; F1.1@62.83,93.064 v1(62.83,93.939)
TCK: J1.9 U1.49 | length 20.8
  Top Layer w0.152: J1.9 51.689,72.517 52.959,73.787 53.625,73.787 61.268,81.429 66.189,81.429 66.996,82.236 U1.49
TDI: J1.7 U1.50 | length 18.7
  Top Layer w0.152: J1.7 54.229,73.655 61.46,80.886 66.281,80.886 67.131,81.736 U1.50
TDO: J1.10 U1.55 | length 22.9
  Top Layer w0.152: J1.10 52.959,71.12 54.864,71.12 55.438,71.694 55.438,74.14 61.672,80.374 66.135,80.374 67.273,79.236 U1.55
TMS: J1.11 U1.46 | length 29
  Top Layer w0.152: J1.11 51.054,74.295 53.373,74.295 62.992,83.914 62.992,84.709 63.679,85.396 70.814,85.396 71.136,85.074 71.136,84.064 U1.46
TRST: J1.5 U1.56 | length 16.6
  Top Layer w0.152: J1.5 56.769,74.764 61.879,79.874 65.928,79.874 67.066,78.736 U1.56
USART_RX: J1.3 U1.17 | length 25.8
  Top Layer w0.152: J1.3 61.087,74.168 61.087,76.454 63.276,78.643 v1(66.144,78.643) ; v1(71.083,78.085) 71.134,78.137 74.39,78.137 77.851,74.676 78.359,74.676 78.419,74.736 U1.17
  Bottom Layer w0.152: v1(66.144,78.643) 66.555,78.232 70.104,78.232 70.251,78.085 v1(71.083,78.085)
USART_TX: J1.1 U1.16 | length 23.7
  Top Layer w0.152: J1.1 61.849,76.581 63.5,78.232 65.659,78.232 65.913,77.978 66.617,77.978 66.891,77.704 v1(67.012,77.704) ; v1(71.084,77.333) 74.64,77.333 77.664,74.309 U1.16
  Bottom Layer w0.152: v1(67.012,77.704) 69.997,77.704 70.368,77.333 v1(71.084,77.333)
pads on no net: IC1.5 IC2.5 IC3.8 U1.2 U1.3 U1.4 U1.6 U1.8 U1.9 U1.10 U1.11 U1.14 U1.15 U1.24 U1.25 U1.26 U1.27 U1.28 U1.29 U1.35 U1.36 U1.37 U1.38 U1.39 U1.40 U1.41 U1.42 U1.43 U1.51 U1.52 U1.53 U1.54 U1.57 U1.58 U1.59 U1.61 U1.62

## Polygon pours and split planes (outlines as drawn)
P3V3 on Top Layer "P3V3_L01_P006" (solid, remove dead copper, pour order 6): 65.586,76.061 65.586,72.063 64.643,71.12 61.087,71.12 60.706,70.739 60.706,69.215 61.214,68.707 65.913,68.707 65.913,70.307 66.06,70.454 70.417,70.454 70.43,70.441 70.43,71.887 70.307,72.01 70.307,73.904 70.5,74.097 71.938,74.097 72.009,74.168 72.009,75.316 70.555,76.771 70.555,78.293 70.875,78.613 74.549,78.613 77.089,76.073 77.724,76.073 78.305,76.654 78.305,82.406 78.576,82.677 81.882,82.677 82.009,82.804 82.009,85.184 82.169,85.344 84.074,85.344 84.709,84.709 84.709,80.645 86.106,79.248 93.345,79.248 93.726,78.867 93.726,77.851 93.472,77.597 91.948,77.597 91.694,77.343 91.694,74.422 93.091,73.025 93.98,73.025 94.234,72.771 94.234,69.977 93.98,69.723 82.804,69.723 82.009,70.518 82.009,76.236 81.059,76.236 81.059,74.582 80.645,74.168 78.486,74.168 78.232,73.914 78.232,71.882 77.729,71.379 74.442,71.379 74.429,71.366 74.429,70.366 77.335,70.366 78.994,68.707 94.869,68.707 96.012,69.85 96.012,82.296 93.218,85.09 86.868,85.09 86.518,85.44 86.518,89.377 86.304,89.591 82.558,89.591 82.558,88.641 83.561,88.641 83.901,88.981 85.779,88.981 85.927,88.832 85.927,87.549 85.755,87.376 84.328,87.376 83.693,86.741 81.915,86.741 81.313,86.139 80.297,86.139 79.375,85.217 78.359,85.217 78.105,84.963 78.105,83.058 77.938,82.891 69.999,82.891 69.707,83.182 69.707,84.962 65.737,84.962 65.603,84.828 65.603,83.637 65.469,83.503 63.437,83.503 62.992,83.058 62.992,82.423 63.246,82.169 66.421,82.169 66.929,82.677 69.201,82.677 69.503,82.375 69.503,74.537 69.173,74.207 67.276,74.207 67.072,74.411 67.072,75.676 66.687,76.061 66.536,76.061
P3V3 on Top Layer "P3V3_L01_P002" (solid, remove dead copper, pour order 2): 72.377,91.046 71.82,90.489 71.82,89.981 70.485,88.646 70.485,86.741 71.374,86.741 72.669,85.446 75.514,85.446 76.073,86.006 76.073,90.805 75.819,91.059 75.806,91.046 75.466,91.046
GND on Top Layer "GND_L01_P001" (solid, remove dead copper, pour order 1): 73.241,91.696 72.279,91.696 71.388,90.805 68.58,90.805 67.818,90.043 63.881,90.043 63.5,89.662 63.5,86.995 63.754,86.741 70.009,86.741 70.053,86.785 70.053,88.525 71.628,90.101 71.628,90.551 72.373,91.296 73.241,91.296
NetC5_2 on Top Layer "NETC5_2_L01_P000" (solid, remove dead copper, pour order 0): 73.241,92.346 72.373,92.346 72.009,92.71 69.872,92.71 69.754,92.828 69.754,93.972 64.009,93.972 63.632,93.595 63.632,91.623 63.357,91.348 61.607,91.348 61.607,90.348 67.488,90.348 68.447,91.307 71.622,91.307 72.261,91.946 73.241,91.946
GND on Bottom Layer "GND_L02_P005" (solid, remove dead copper, pour order 5): 31.115,67.691 31.115,96.139 31.242,96.266 107.696,96.266 107.696,67.945 107.823,67.818
P12V0 on Bottom Layer "P12V0_L02_P004" (solid, remove dead copper, pour order 4): 31.242,96.266 31.242,91.137 41.226,91.137 43.688,93.599 94.615,93.599 97.077,91.137 107.696,91.137 107.696,96.266
P3V3 on Bottom Layer "P3V3_L02_P003" (solid, remove dead copper, pour order 3): 72.517,82.169 72.715,81.971 75.5,81.971 75.69,82.162 75.69,85.885 75.445,86.13 75.377,86.062 72.706,86.062 72.517,85.873 72.517,85.852

## Silkscreen, mask and mechanical layers (free items; w line width, h text height)
Top Overlay:
  region: 61.976,84.328 63.119,84.328 63.119,83.185
  lines w0.254: 47.879,79.311 63.119,79.311 ; 50.419,74.295 50.419,84.328 ; 52.959,74.295 52.959,84.328 ; 55.499,74.295 55.499,84.328 ; 58.039,74.295 58.039,84.328 ; 60.579,74.295 60.579,84.328 ; 47.879,74.295 63.119,74.295 63.119,84.328 47.879,84.328 47.879,74.295
  text "Mazda3 IC MITM" at 40.93,94.246 h1.5
  text "Rev 1.0" at 83.39,93.992 h1.5
  text "U" at 41.35,91 h2
  text "U" at 96.35,91 h2
  text "B" at 41.35,87 h2
  text "B" at 96.35,87 h2
  text "D" at 41.35,83 h2
  text "D" at 96.35,83 h2
  text "TMS" at 49.649,79.947 h1 r90
  text "TCK" at 52.189,79.947 h1 r90
  text "TDI" at 54.729,79.947 h1 r90
  text "TRST" at 57.269,79.947 h1 r90
  text "RX" at 59.809,79.947 h1 r90
  text "TX" at 62.349,79.947 h1 r90
  text "T" at 41.35,79 h2
  text "T" at 96.35,79 h2
  text "K" at 41.35,75 h2
  text "K" at 96.35,75 h2
  text "GND" at 49.649,74.867 h1 r90
  text "TDO" at 52.189,74.867 h1 r90
  text "GND" at 54.729,74.867 h1 r90
  text "NRST" at 57.269,74.867 h1 r90
  text "GND" at 59.809,74.867 h1 r90
  text "3V3" at 62.349,74.867 h1 r90
  text "A" at 41.35,71 h2
  text "A" at 96.35,71 h2
  text "HARNESS SIDE" at 34.226,70.256 h2 r90
  text "CLUSTER SIDE" at 106.773,70.256 h2 r90
Board Shape:
  the board outline again, w0.254
Mechanical 3:
  drawing of 191 lines, arcs and shapes, not listed
  text "Layer" at 16.402,127.635 h1.52
  text "Name" at 26.814,127.635 h1.52
  text "Material" at 50.429,127.635 h1.52
  text "Thickness" at 72.267,127.635 h1.52
  text "Constant" at 88.773,127.635 h1.52
  text "Board Layer Stack" at 103.247,127.635 h1.52
  text "Top Overlay" at 26.814,124.587 h1.52
  text "Top Solder" at 26.814,121.539 h1.52
  text "Solder Resist" at 50.429,121.539 h1.52
  text "0.010mm" at 72.267,121.539 h1.52
  text "3.5" at 88.773,121.539 h1.52
  text "1" at 16.402,118.491 h1.52
  text "Top Layer" at 26.814,118.491 h1.52
  text "0.036mm" at 72.267,118.491 h1.52
  text "Dielectric 1" at 26.814,115.443 h1.52
  text "FR-4" at 50.429,115.443 h1.52
  text "1.000mm" at 72.267,115.443 h1.52
  text "4.8" at 88.773,115.443 h1.52
  text "2" at 16.402,112.395 h1.52
  text "Bottom Layer" at 26.814,112.395 h1.52
  text "0.036mm" at 72.267,112.395 h1.52
  text "Bottom Solder" at 26.814,109.347 h1.52
  text "Solder Resist" at 50.429,109.347 h1.52
  text "0.010mm" at 72.267,109.347 h1.52
  text "3.5" at 88.773,109.347 h1.52
  text "Bottom Overlay" at 26.814,106.299 h1.52

## Dimensions
31.242,96.3 to 107.758,96.3 on Dimensions
31.242,67.7 to 31.242,96.3 on Dimensions